# Altium PCB UBT.PcbDoc
Units mm, origin at the board's own origin, x right, y up, seen from the top; angles counter-clockwise.
Board outline 152.4 x 101.6 mm, 2 copper layers (Top Layer, Bottom Layer); 90 components, 72 nets, 398 pads, 36 vias.
Unrouted connection lines stored in the file: 211.
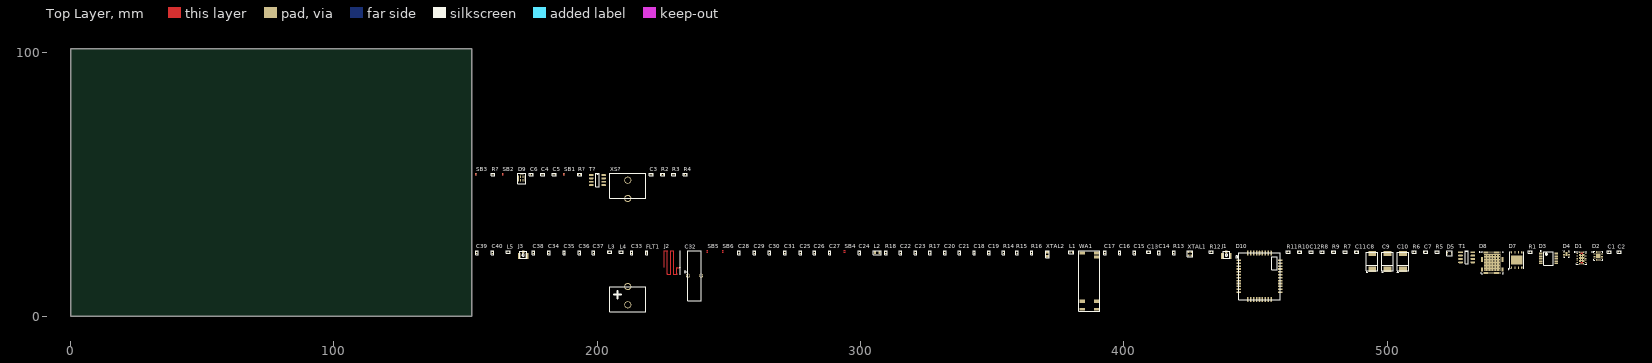
[diagram p0: Top Layer view]
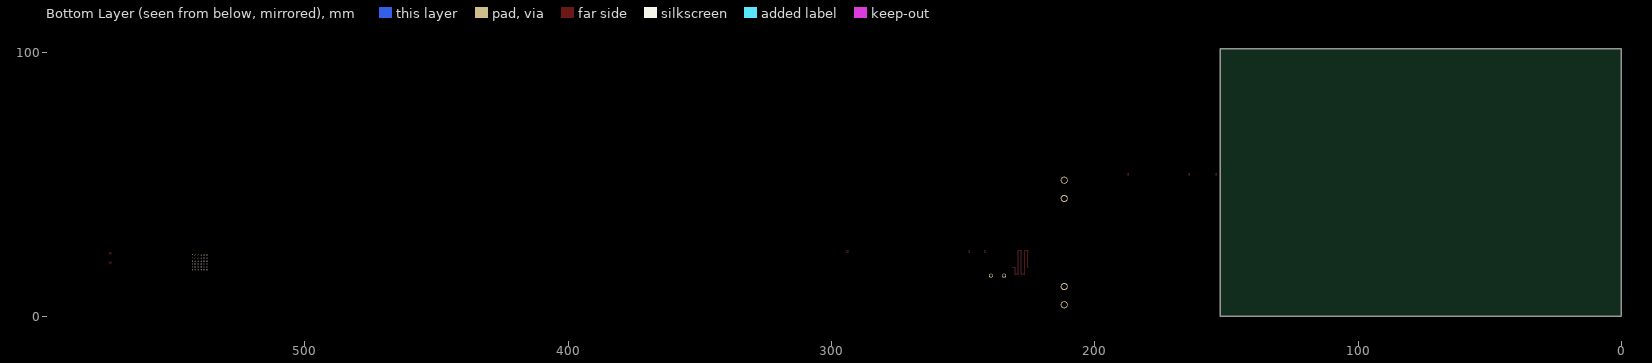
[diagram p1: Bottom Layer view, seen from below]

## Layer stack, top to bottom
Top Solder: solder mask 0.0102, Solder Resist, Dk 3.5
Top Layer: signal copper 0.0356
Dielectric 1: dielectric 0.32, FR-4, Dk 4.8
Bottom Layer: signal copper 0.0356
Bottom Solder: solder mask 0.0102, Solder Resist, Dk 3.5

## Board outline
0,0 152.4,0 152.4,101.6 0,101.6

## Design rules (kind name [scope] priority, off if disabled: settings)
Clearance [All] p1: gap=0.254
PolygonConnect [All] p1: connectstyle=Relief reliefconductorwidth=0.254 reliefentries=4 polygonreliefangle="90 Angle" airgapwidth=0.254
RoomDefinition UBT [InComponentClass('UBT')] p1: confinementstyle=ConfineIn formatcopy=TRUE lockcomponents=FALSE outline 153.543,1.524 590.55,1.524 590.55,27.686 153.543,27.686
RoutingVias [All] p1: holewidth=0.711 width=1.27 viastyle="Through Hole" minholewidth=0.711 minwidth=1.27 maxholewidth=0.711 maxwidth=1.27
SolderMaskExpansion [All] p1: expansion=0.102
Width [All] p1: maxlimit=0.254 minlimit=0.254 preferedwidth=0.254
30 further rules are at their usual default settings.

## Components (designator, comment, footprint, x,y, rotation, side; value= is the part's Value field where it differs from the comment)
C1 "100n" C0402 584.327,24.384 r0 top
C2 "100n" C0402 588.137,24.384 r0 top
C3 "100n" C0402 220.472,53.721 r0 top
C4 "100n" C0402 179.324,53.721 r0 top
C5 "100n" C0402 183.642,53.721 r0 top
C6 "100n" C0402 175.006,53.721 r0 top
C7 "100n" C0402 514.604,24.384 r0 top
C8 "330u" C_TYPE_D 494.284,20.828 r90 top
C9 "330u" C_TYPE_D 500.126,20.828 r90 top
C10 "330u" C_TYPE_D 505.968,20.828 r90 top
C11 "100n" C0402 488.315,24.384 r0 top
C12 "Not Fitted" C0402 471.043,24.384 r0 top
C13 "Not Fitted" C0402 409.321,24.384 r0 top
C14 "10p" C0402 413.385,24.13 r90 top
C15 "100n" C0402 403.987,24.13 r90 top
C16 "100n" C0402 398.399,24.13 r90 top
C17 "100n" C0402 392.811,24.13 r90 top
C18 "100n" C0402 343.154,24.13 r90 top
C19 "10p" C0402 348.742,24.13 r90 top
C20 "C" C0402 331.978,24.13 r90 top
C21 "C" C0402 337.566,24.13 r90 top
C22 "100n" C0402 315.214,24.13 r90 top
C23 "100p" C0402 320.802,24.13 r90 top
C24 "100n" C0402 299.593,24.13 r90 top
C25 "4.7u" C0402 277.114,24.13 r90 top
C26 "4.7u" C0402 282.448,24.13 r90 top
C27 "100n" C0402 288.29,24.13 r90 top
C28 "100n" C0402 253.873,24.13 r90 top
C29 "100n" C0402 259.715,24.13 r90 top
C30 "100n" C0402 265.43,24.13 r90 top
C31 "100n" C0402 271.272,24.13 r90 top
C32 "Supercap" Supercap_5mm 234.442,15.367 r0 top
C33 "10n" C0402 213.106,24.13 r90 top
C34 "0.8p" C0402 181.61,24.13 r90 top
C35 "0.3p" C0402 187.452,24.13 r90 top
C36 "Not Fitted" C0402 193.294,24.13 r90 top
C37 "1.2p" C0402 198.628,24.13 r90 top
C38 "Not Fitted" C0402 175.768,24.13 r90 top
C39 "Not Fitted" C0402 154.305,24.13 r90 top
C40 "Not Fitted" C0402 160.147,24.13 r90 top
D1 "BQ51013B" VQFN20 573.786,22.098 r0 top
D2 "BQ24232" VQFN-16 580.136,22.86 r0 top
D3 "NTS0304EPW" TSSOP14 561.213,21.971 r0 top
D4 "TPS62081" WSON8 568.071,23.622 r0 top
D5 "IIS2DH" LGA12 522.859,24.638 r0 top
D7 "eSim" VQFN8 549.148,21.336 r0 top
D8 "STM32WB55Rx" VFQFPN68 539.877,20.32 r0 top
D9 "MP34DT06J" MP34DT06J 171.323,52.197 r0 top
D10 "SIM7020E" SIM7020E 443.611,21.209 r0 top
FLT1 "LFB182G45CGFD436" LFB182G45CGFD436 218.821,23.495 r90 top
J1 "Connector(U.FL)" U.FL 438.912,24.384 r0 top
J2 "Antenna_2.4Ghz" Antenna_2.4Ghz 231.521,18.415 r90 top
J3 "Connector(U.FL)" U.FL 171.831,24.384 r0 top
L1 "FCM1608KF-601T03" L1608 379.476,24.257 r0 top
L2 "10u" L0805 305.435,24.13 r0 top
L3 "2.7n" L0402 204.724,24.384 r0 top
L4 "3.6u" L0402 209.042,24.384 r0 top
L5 "0u" L0402 166.116,24.384 r0 top
R1 "10M" R0402 554.355,24.384 r0 top
R2 "4k7" R0402 224.79,53.721 r0 top
R3 "4k7" R0402 229.108,53.721 r0 top
R4 "1M" R0402 233.426,53.721 r0 top
R5 "10M" R0402 518.922,24.384 r0 top
R6 "200" R0402 510.286,24.384 r0 top
R7 "1M" R0402 483.997,24.384 r0 top
R8 "10M" R0402 475.361,24.384 r0 top
R9 "10M" R0402 479.679,24.384 r0 top
R10 "1M" R0402 466.725,24.384 r0 top
R11 "10M" R0402 462.407,24.384 r0 top
R12 "0R" R0402 433.197,24.384 r0 top
R13 "200" R0402 418.973,24.13 r90 top
R14 "0R" R0402 354.33,24.13 r90 top
R15 "0R" R0402 359.41,24.13 r90 top
R16 "0R" R0402 364.998,24.13 r90 top
R17 "200" R0402 326.39,24.13 r90 top
R18 "0R" R0402 309.626,24.13 r90 top
R? "1M" R0402 193.294,53.721 r0 top
R? "R" R0402 160.401,53.721 r0 top
SB1 "SB" SB 187.325,53.467 r90 top
SB2 "SB" SB 164.084,53.467 r90 top
SB3 "SB" SB 153.924,53.467 r90 top
SB4 "SB" SB 293.878,24.13 r90 top
SB5 "SB" SB 241.808,24.13 r90 top
SB6 "SB" SB 247.65,24.13 r90 top
T1 "IRF7410" SO8 527.812,24.257 r0 top
T? "IRF7410" SO8 197.739,53.594 r0 top
WA1 "SR4L049-R" SR4L049-R 384.175,2.667 r90 top
XS? "12BH092-GR" 12BH092-GR 211.582,4.318 r90 top
XTAL1 "XTAL" NX2016SA 424.561,22.987 r90 top
XTAL2 "32.768 kHz" NX2012SA 370.967,22.733 r90 top

## Footprints (in the part's own frame and the unit in brackets; to place one, negate y for a bottom-side part, rotate by r counter-clockwise, add the part's x,y. Pads: shape width x height; smd on the part's side, far side on the other; paste and mask are expansions set on the pad)
12BH092-GR [mm]
  round 2.7 hole 2: 1(0,0) 1(6.9,0) 2(40.4,0) 2(47.3,0)
  silkscreen extent -2.6,-6.8 49.9,6.8
Antenna_2.4Ghz [mm]
  rect 0.4x0.4 smd: 1(0,0.2)
  Top Layer region: -0.2,1.1 0.2,1.1 0.2,1.5 -0.2,1.5
  Top Layer region: -2.7,1.1 -2.3,1.1 -2.3,1.5 -2.7,1.5
  Top Layer region: -2.7,2.3 -2.3,2.3 -2.3,2.7 -2.7,2.7
  Top Layer region: 6.2,2.3 6.6,2.3 6.6,2.7 6.2,2.7
  Top Layer region: 6.2,3.5 6.6,3.5 6.6,3.9 6.2,3.9
  Top Layer region: -2.7,3.5 -2.3,3.5 -2.3,3.9 -2.7,3.9
  Top Layer region: -2.7,4.7 -2.3,4.7 -2.3,5.1 -2.7,5.1
  Top Layer region: 6.2,4.7 6.6,4.7 6.6,5.1 6.2,5.1
  Top Layer region: 6.2,5.9 6.6,5.9 6.6,6.3 6.2,6.3
  Top Layer region: 0,5.9 0.4,5.9 0.4,6.3 0,6.3
  Top Layer lines w0.4: 0.2,6.1 6.4,6.1 6.4,4.9 -2.5,4.9 -2.5,3.7 6.4,3.7 6.4,2.5 -2.5,2.5 -2.5,1.3 0,1.3 0,0.2
  silkscreen extent -2.6,0 6.5,0
C0402 [mm]
  rect 0.4x0.6 smd: 1(-0.4,0) 2(0.4,0)
  silkscreen extent -0.75,-0.45 0.76,0.46
C_TYPE_D [mm]
  rect 2x3 smd: 1(-3,0) 2(3,0)
  silkscreen extent -4.4,-2.1 3.5,2.3
L0402 [mm]
  rect 0.4x0.6 smd: 1(-0.4,0) 2(0.5,0)
  silkscreen extent -0.7,-0.45 0.8,0.46
L0805 [mm]
  rect 0.8x1.2 smd: 1(0,0) 2(1.8,0)
  silkscreen extent -0.55,-0.75 2.35,0.75
L1608 [mm]
  rect 0.5x1 smd: 1(0,0) 2(1.1,0)
  silkscreen extent -0.4,-0.65 1.5,0.65
LFB182G45CGFD436 [mm]
  rect 0.25x0.55 smd: 1(0,0) 3(1.11,0)
  rect 0.4x0.6 smd: 2(0.555,0)
  silkscreen extent -0.26,-0.4 1.34,0.4
LGA12 [mm]
  rect 0.325x0.3 smd: 1(0,0) 2(0,-0.5) 3(0,-1) 4(0,-1.5) 7(1.525,-1.5) 8(1.525,-1) 9(1.525,-0.5) 10(1.525,0)
  rect 0.3x0.325 smd: 5(0.513,-1.512) 6(1.012,-1.512) 11(1.012,0.012) 12(0.513,0.012)
  silkscreen extent -0.41,-1.75 1.76,0.25
MP34DT06J [mm]
  rect 0.4x0.95 smd: 1(-0.425,0.675) 2(-0.425,-0.675) 3(0.425,-0.675) 4(0.425,0.675)
  rect 0.35x2.3 smd: 5(-1.225,0) 5(1.225,0)
  rect 1.3x0.35 smd: 5(0,-1.725) 5(0,1.725)
  silkscreen extent -1.5,-1.99 1.5,2.01
NX2012SA [mm]
  rect 1x1.25 smd: 1(0,0) 2(1.5,0)
  silkscreen extent -0.65,-0.75 2.15,0.75
NX2016SA [mm]
  rect 0.85x0.75 smd: 1(0,-1.05) 2(1.35,0) GND(0,0) GND(1.35,-1.05)
  silkscreen extent -0.5,-1.5 1.85,0.45
R0402 [mm]
  rect 0.4x0.6 smd: 1(-0.4,0) 2(0.4,0)
  silkscreen extent -0.75,-0.45 0.74,0.46
SB [mm]
  rect 0.2x0.2 smd: 1(0.1,0) 2(0.7,0)
  Top Layer region: 0.65,0.2 0.45,0 0.65,-0.2 0.85,-0.2 0.85,0.2
  Top Layer region: 0,0.2 0.4,0.2 0.2,0 0.4,-0.2 0,-0.2
  Top Layer pour cut-out: 0,0 0,0.2
SIM7020E [mm]
  rrect50% 1.8x0.6 smd: 1(0,0) 2(0,-1.1) 3(0,-2.2) 4(0,-3.3) 5(0,-4.4) 6(0,-5.5) 7(0,-6.6) 8(0,-7.7) 9(0,-8.8) 10(0,-9.9) 11(0,-11) 12(0,-12.1) 22(15.7,-12.1) 23(15.7,-11) 24(15.7,-9.9) 25(15.7,-8.8) 26(15.7,-7.7) 27(15.7,-6.6) 28(15.7,-5.5) 29(15.7,-4.4) 30(15.7,-3.3) 31(15.7,-2.2) 32(15.7,-1.1) 33(15.7,0)
  rrect50% 0.6x1.8 smd: 13(3.45,-14.85) 14(4.55,-14.85) 15(5.65,-14.85) 16(6.75,-14.85) 17(7.85,-14.85) 18(8.95,-14.85) 19(10.05,-14.85) 20(11.15,-14.85) 21(12.25,-14.85) 34(12.25,2.75) 35(11.15,2.75) 36(10.05,2.75) 37(8.95,2.75) 38(7.85,2.75) 39(6.75,2.75) 40(5.65,2.75) 41(4.55,2.75) 42(3.45,2.75)
  silkscreen extent -1.22,-14.9 15.7,2.8
SO8 [mm]
  oval 1.78x0.72 smd: 1(0,-2.54) 1(0,-1.27) 4(0,-3.81) 5(4.68,-3.81) 5(4.68,-2.54) 5(4.68,-1.27) 5(4.68,0)
  rect 1.78x0.72 smd: 1(0,0)
  silkscreen extent 1.72,-4.44 2.96,0.64
SR4L049-R [mm]
  rect 1x2 smd: 1(21.3,-5.4) 2(19.8,-5.4) 4(0,-5.4) 5(0,0) 7(21.3,0)
  rect 1.5x2 smd: 3(3,-5.4) 6(3,0)
  silkscreen extent -0.81,-6.7 22.19,1.3
Supercap_5mm [mm]
  round 1.5 hole 1.1: 1(0,0) 2(5,0)
  silkscreen extent -1.5,-9.5 5,9.5
TSSOP14 [mm] "TSSOP14"
  oval 1.45x0.45 smd: 1(-2.925,1.95) 2(-2.925,1.3) 3(-2.925,0.65) 4(-2.925,0) 5(-2.925,-0.65) 6(-2.925,-1.3) 7(-2.925,-1.95) 8(2.925,-1.95) 9(2.925,-1.3) 10(2.925,-0.65) 11(2.925,0) 12(2.925,0.65) 13(2.925,1.3) 14(2.925,1.95)
  silkscreen extent -3.05,-2.55 1.8,2.85, body extent -2.2,-2.55 2.2,2.55, height 1.1
U.FL [mm]
  rect 1x1.05 smd: 1(0,0)
  rect 1.05x2.2 smd: 2(-1.475,-1.525) 2(1.475,-1.525)
  silkscreen extent -1.3,-2.4 1.3,0.2
VFQFPN68 [mm] "VFQFPN68"
  oval 0.8x0.2 smd: 1(-3.875,3.2) 2(-3.875,2.8) 3(-3.875,2.4) 4(-3.875,2) 5(-3.875,1.6) 6(-3.875,1.2) 7(-3.875,0.8) 8(-3.875,0.4) 9(-3.875,0) 10(-3.875,-0.4) 11(-3.875,-0.8) 12(-3.875,-1.2) 13(-3.875,-1.6) 14(-3.875,-2) 15(-3.875,-2.4) 16(-3.875,-2.8) 17(-3.875,-3.2) 35(3.875,-3.2) 36(3.875,-2.8) 37(3.875,-2.4) 38(3.875,-2) 39(3.875,-1.6) 40(3.875,-1.2) 41(3.875,-0.8) 42(3.875,-0.4) 43(3.875,0) 44(3.875,0.4) 45(3.875,0.8) 46(3.875,1.2) 47(3.875,1.6) 48(3.875,2) 49(3.875,2.4) 50(3.875,2.8) 51(3.875,3.2)
  oval 0.2x0.8 smd: 18(-3.2,-3.875) 19(-2.8,-3.875) 20(-2.4,-3.875) 21(-2,-3.875) 22(-1.6,-3.875) 23(-1.2,-3.875) 24(-0.8,-3.875) 25(-0.4,-3.875) 26(0,-3.875) 27(0.4,-3.875) 28(0.8,-3.875) 29(1.2,-3.875) 30(1.6,-3.875) 31(2,-3.875) 32(2.4,-3.875) 33(2.8,-3.875) 34(3.2,-3.875) 52(3.2,3.875) 53(2.8,3.875) 54(2.4,3.875) 55(2,3.875) 56(1.6,3.875) 57(1.2,3.875) 58(0.8,3.875) 59(0.4,3.875) 60(0,3.875) 61(-0.4,3.875) 62(-0.8,3.875) 63(-1.2,3.875) 64(-1.6,3.875) 65(-2,3.875) 66(-2.4,3.875) 67(-2.8,3.875) 68(-3.2,3.875)
  rect 6.4x6.4 smd: 69(0,0)
  silkscreen extent -5,-4.22 4.22,4.23, body extent -4.08,-4.07 4.07,4.08, height 0.9
VQFN8 [mm] "VQFN8"
  oval 0.4x0.95 smd: 1(-1.905,-2.875) 2(-0.635,-2.875) 3(0.635,-2.875) 4(1.905,-2.875) 5(1.905,2.875) 6(0.635,2.875) 7(-0.635,2.875) 8(-1.905,2.875)
  rect 4.2x3.4 smd: 9(0,0)
  silkscreen extent -3.22,-3.62 2.7,3.2, body extent -2.55,-3.05 2.55,3.05, height 0.9
VQFN20 [mm] "VQFN20"
  oval 0.25x0.6 smd: 1(-0.75,2.15) 10(-0.75,-2.15) 11(0.75,-2.15) 20(0.75,2.15) 25(-0.25,-2.15) 25(-0.25,2.15) 25(0.25,-2.15) 25(0.25,2.15)
  oval 0.6x0.25 smd: 2(-1.65,1.75) 3(-1.65,1.25) 4(-1.65,0.75) 5(-1.65,0.25) 6(-1.65,-0.25) 7(-1.65,-0.75) 8(-1.65,-1.25) 9(-1.65,-1.75) 12(1.65,-1.75) 13(1.65,-1.25) 14(1.65,-0.75) 15(1.65,-0.25) 16(1.65,0.25) 17(1.65,0.75) 18(1.65,1.25) 19(1.65,1.75)
  rect 2.05x3.05 smd: 25(0,0)
  round 0.2 hole 0.2: 26(0,0.525) 27(0,-0.525) 28(0.775,-0.525) 29(-0.775,0.525) 30(-0.775,-0.525) 31(0,-1.275) 32(0.775,0.525) 33(0,1.275)
  Top Layer pour cut-out: -0.377,-1.51
  Top Layer region: 0.373,-1.515 0.373,-1.965 -0.375,-1.965 -0.375,-1.512 -0.377,-1.51
  Top Layer region: -0.376,1.498 -0.376,1.965 0.371,1.965 0.371,1.498
  silkscreen extent -2.72,-2.45 1.95,2.45, body extent -1.8,-2.3 1.8,2.3, height 1
VQFN-16 [mm] "VQFN-16"
  oval 0.8x0.25 smd: 1(-1.45,0.75) 2(-1.45,0.25) 3(-1.45,-0.25) 4(-1.45,-0.75) 9(1.45,-0.75) 10(1.45,-0.25) 11(1.45,0.25) 12(1.45,0.75)
  oval 0.25x0.8 smd: 5(-0.75,-1.45) 6(-0.25,-1.45) 7(0.25,-1.45) 8(0.75,-1.45) 13(0.75,1.45) 14(0.25,1.45) 15(-0.25,1.45) 16(-0.75,1.45)
  rect 1.68x1.68 smd: 17(0,0)
  silkscreen extent -2.47,-1.7 1.7,1.7, body extent -1.55,-1.55 1.55,1.55, height 1
WSON8 [mm] "WSON8"
  rect 0.8x0.3 smd: 1(-0.945,0.75) 2(-0.945,0.25) 3(-0.945,-0.25) 4(-0.945,-0.75) 5(0.945,-0.75) 6(0.945,-0.25) 7(0.945,0.25) 8(0.945,0.75)
  rect 0.69x1.6 smd: 9(0,0)
  silkscreen extent -1.5,-1.2 1.05,1.25, body extent -1.05,-1.05 1.05,1.05, height 0.8

## Part data
C1 C2 C3 C4 C5 C6 C7 C11 C12 C13 C14 C15 C16 C17 C18 C19 C22 C23 C24 C25 C26 C27 C28 C29 C30 C31 C33 C34 C35 C36 C37 C38 C39 C40: library part C
C8 C9 C10: library part C_TANTAL
L1 L2 L3 L4 L5: library part L
R1 R2 R3 R4 R5 R6 R7 R8 R9 R10 R11 R12 R13 R14 R15 R16 R17 R18 R?: library part R

## Via types
v1: diameter 0.5, hole 0.2, Top Layer to Bottom Layer, 36 vias

## Nets (pads, with @x,y where several pads share a name; then routed paths per layer and width w, separated by ;. In a path a pad name is that pad's centre, name@x,y a point inside that pad or via, vN(x,y) a via of type N, cw(c..) or ccw(c..) an arc to the next point about the centre after c; other vN are vias at no path point)
3V3: C2.1 D3.14 R5.1 R8.1 R9.1 R11.1 T1.1
A_INT1: C5.2 D5.12 D8.38
A_INT2: C4.2 D5.11 D8.39
A_SCL: D5.1 D8.66 R3.1
A_SDA: D5.4 D8.67 R2.1
AVVD: C16.1 D8.13 D8.14 L1.2 SB5.1
GSM_1v8: C1.2 D3.1 D10.40
GSM_DTR: D3.5 D10.6
GSM_PWR_ON: R6.1
GSM_PWRKEY: R13.2
GSM_RESET: R17.2
GSM_RTC_EINT: D10.12 R8.2
GSM_RTS: D3.4 D10.3
GSM_RX: D3.3 D10.2
GSM_TX: D3.2 D10.1
JTCK_SWCLK: D8.56
JTDI: D8.57
JTDO: D8.63
JTMS_SWDIO: D8.54
MCU_GSM_CTS: D8.52 D10.4
MCU_GSM_DTR: D3.10 D8.23
MCU_GSM_RI: D10.7 R9.2
MCU_GSM_RTS: D3.11 D8.53
MCU_GSM_RX: D3.13 D8.51
MCU_GSM_STATUS: D10.42 R11.2
MCU_GSM_TX: D3.12 D8.24
MCU_VBAT: C18.1 D8.1 SB6.1
MICRO_CLK: D8.6 D9.3
MICRO_DOUT: C1.1 C2.2 C3.1 C4.1 C5.1 C6.1 C7.1 C8.2 C9.2 C10.2 C11.1 C12.2 C13.2 C14.2 C15.1 C16.2 C17.1 C18.2 C19.2 C20.1 C21.1 C22.1 C23.1 C24.1 C25.1 C26.1 C27.1 C28.1 C29.1 C30.1 C31.1 C32.2 C34.1 C35.1 C36.1 C37.1 C39.1 C40.1 D3.7 D5.5 D5.6 D5.7 D5.8 D7.1 D8.7 D8.32 D8.42 D9.4 D9.5 D10.8 D10.13 D10.19 D10.21 D10.27 D10.30 D10.31 D10.33 D10.36 D10.37 FLT1.2 J1.2 J3.2 R1.2 R10.2 R18.1 R?.1 SB3.1 XS?.2
NetC7_2: C7.2 R5.2 R6.2 T1.4
NetC8_1: C8.1 C9.1 C10.1 C11.2 D10.34 D10.35 T1.5
NetC12_1: C12.1 D8.34 XTAL1.2
NetC13_1: C13.1 D8.35 XTAL1.1
NetC14_1: C14.1 D8.3 XTAL2.2
NetC15_2: C15.2 D8.8 R7.1
NetC17_2: C17.2 D10.39 R13.1
NetC19_1: C19.1 D8.4 XTAL2.1
NetC20_2: C20.2 R14.2 R15.1
NetC21_2: C21.2 R15.2 R16.1
NetC24_2: C24.2 D10.28 R17.1
NetC25_2: C25.2 D8.41 L2.1 SB4.1
NetC32_1: C32.1 SB6.2
NetC33_1: C33.1 C38.1 FLT1.3
NetC33_2: C33.2 C36.2 L4.1
NetC35_2: C35.2 FLT1.1 L3.2
NetC37_2: C37.2 J2.1 L4.2
NetC38_2: C38.2 C39.2 L5.1
NetC40_2: C40.2 J3.1 L5.2
NetD3_8: D3.8 R1.1
NetD5_2: D5.2 D5.3 R4.1
NetD6_4: R?.2@160.801,53.721
NetD8_5: D8.5 R10.1
NetD8_43: D8.43 L2.2
NetD9_2: D9.2 SB2.2 SB3.2
NetD10_32: D10.32 R12.1 R14.1
NetJ1_1: J1.1 R12.2
NetR16_2: R16.2 WA1.3
NetR18_2: R18.2 WA1.4
NetR?_2: R?.2@193.694,53.721 T?.4
NetT?_5: T?.5 XS?.1
NJTRST: D8.64
RF1: C34.2 D8.31 L3.1
SIM_CLK: D7.6 D10.16
SIM_DATA: D7.3 D10.15
SIM_DET: D10.14
SIM_RST: D7.7 D10.17
SIM_VDD: D7.8 D10.18
TIM2_CH2: D8.16
TIM2_CH3: D8.17
VDD_CELL: T?.1
VDD_MCU: C3.2 C22.2 C23.2 C26.2 C27.2 C28.2 C29.2 C30.2 C31.2 D5.9 D5.10 D8.30 D8.33 D8.44 D8.45 D8.55 D8.68 L1.1 R2.2 R3.2 R4.2 R7.2 SB1.1 SB4.2 SB5.2
VDD_MICRO: C6.2 D8.27 D9.1 SB1.2 SB2.1
pads on no net: D1.1 D1.2 D1.3 D1.4 D1.5 D1.6 D1.7 D1.8 D1.9 D1.10 D1.11 D1.12 D1.13 D1.14 D1.15 D1.16 D1.17 D1.18 D1.19 D1.20 D1.25 D1.26 D1.27 D1.28 D1.29 D1.30 D1.31 D1.32 D1.33 D2.1 D2.2 D2.3 D2.4 D2.5 D2.6 D2.7 D2.8 D2.9 D2.10 D2.11 D2.12 D2.13 D2.14 D2.15 D2.16 D2.17 D3.6 D3.9 D4.1 D4.2 D4.3 D4.4 D4.5 D4.6 D4.7 D4.8 D4.9 D7.2 D7.4 D7.5 D7.9 D8.2 D8.9 D8.10 D8.11 D8.12 D8.15 D8.18 D8.19 D8.20 D8.21 D8.22 D8.25 D8.26 D8.28 D8.29 D8.36 D8.37 D8.40 D8.46 D8.47 D8.48 D8.49 D8.50 D8.58 D8.59 D8.60 D8.61 D8.62 D8.65 D8.69 D10.5 D10.9 D10.10 D10.11 D10.20 D10.22 D10.23 D10.24 D10.25 D10.26 D10.29 D10.38 D10.41 WA1.1 WA1.2 WA1.5 WA1.6 WA1.7 XTAL1.GND
copper on no net:
  other v1: 537.127,17.57 538.227,17.57 539.327,17.57 540.427,17.57 541.527,17.57 542.627,17.57 537.127,18.67 538.227,18.67 539.327,18.67 540.427,18.67 541.527,18.67 542.627,18.67 537.127,19.77 538.227,19.77 539.327,19.77 540.427,19.77 541.527,19.77 542.627,19.77 537.127,20.87 538.227,20.87 539.327,20.87 540.427,20.87 541.527,20.87 542.627,20.87 537.127,21.97 538.227,21.97 539.327,21.97 540.427,21.97 541.527,21.97 542.627,21.97 537.127,23.07 538.227,23.07 539.327,23.07 540.427,23.07 541.527,23.07 542.627,23.07